# Altium PCB Copy of PCI Express_16765X6890_164PIN_Low profile.PCBDOC
Units mm, origin at the board's own origin, x right, y up, seen from the top; angles counter-clockwise.
Board outline 167.75 x 69 mm, 4 copper layers (TopLayer, InternalPlane1, InternalPlane2, BottomLayer); 1 components, 81 nets, 166 pads, 0 vias.
Unrouted connection lines stored in the file: 76.
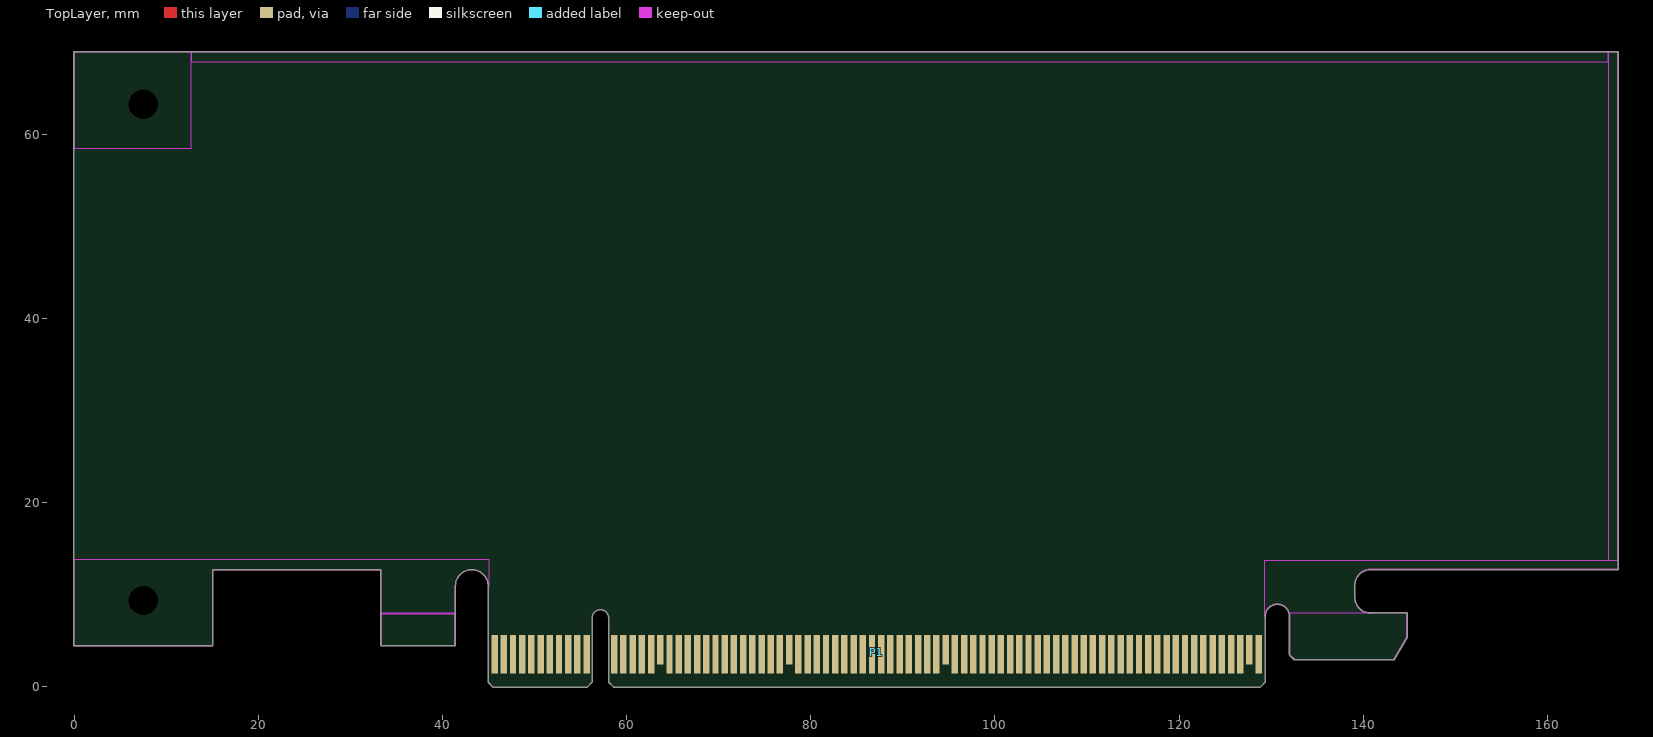
[diagram p0: TopLayer view]
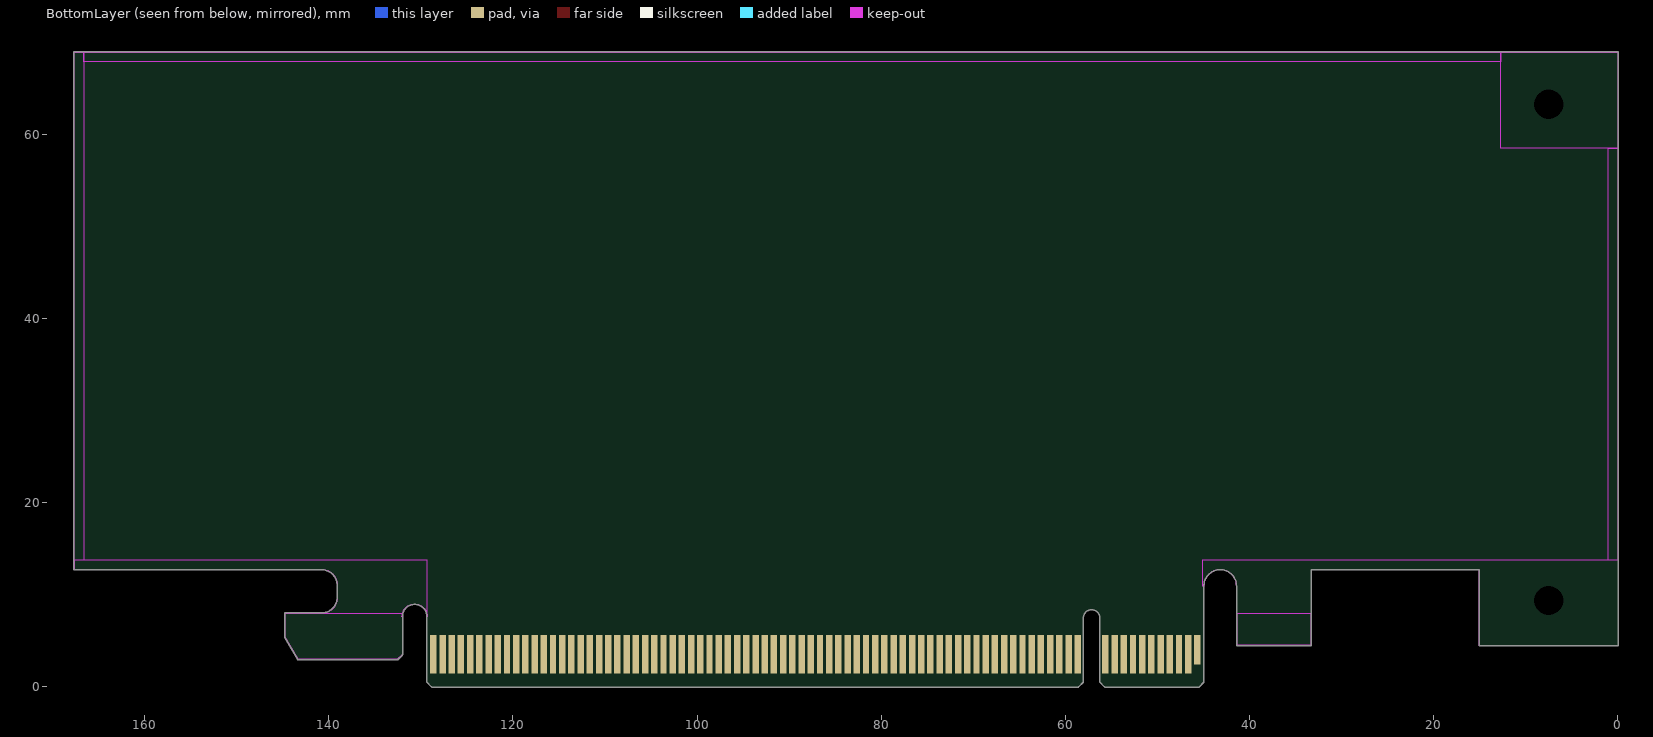
[diagram p1: BottomLayer view, seen from below]
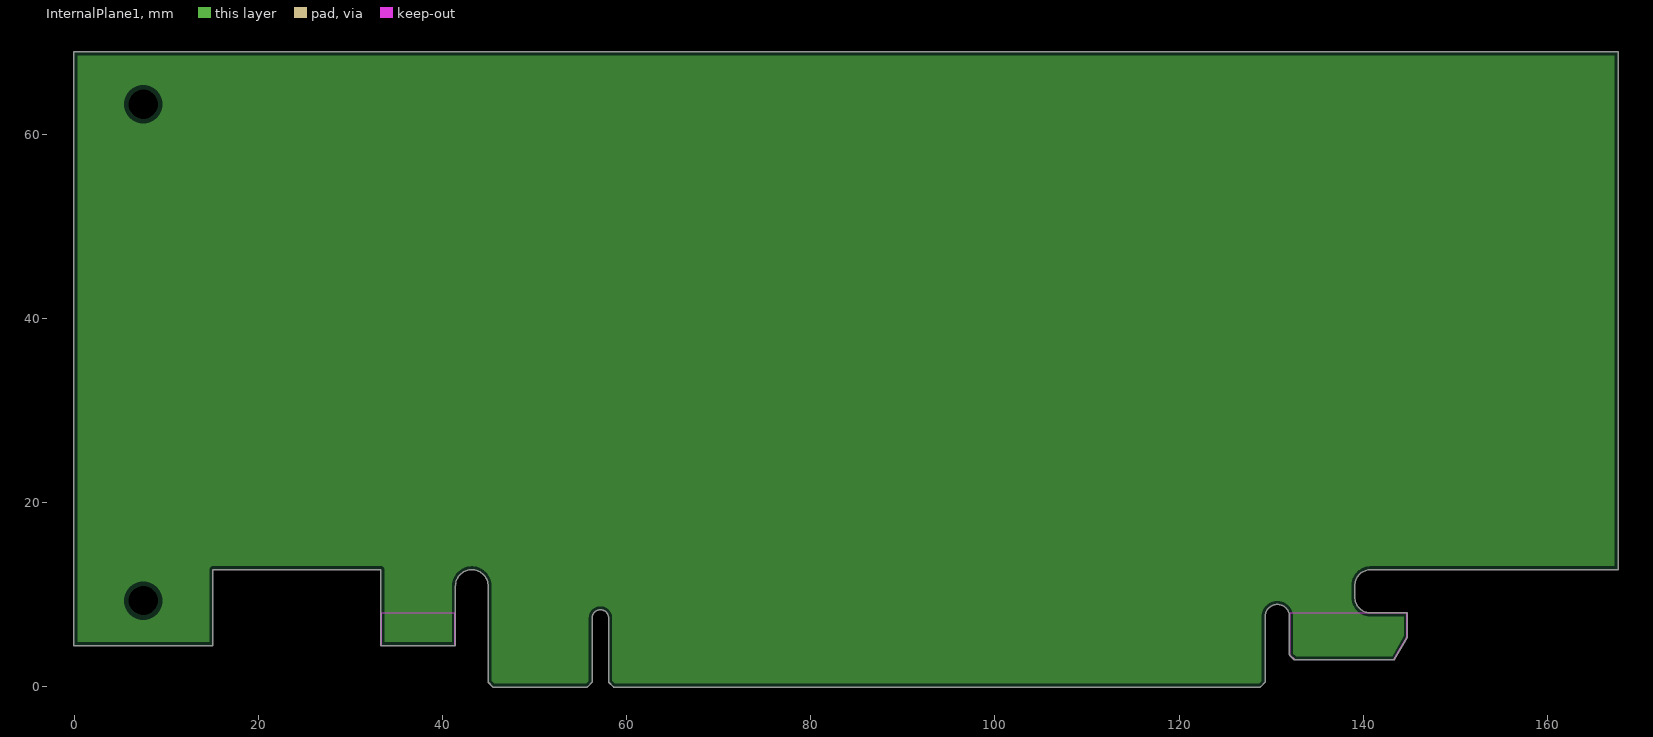
[diagram p2: InternalPlane1, clearances drawn from the general rule]
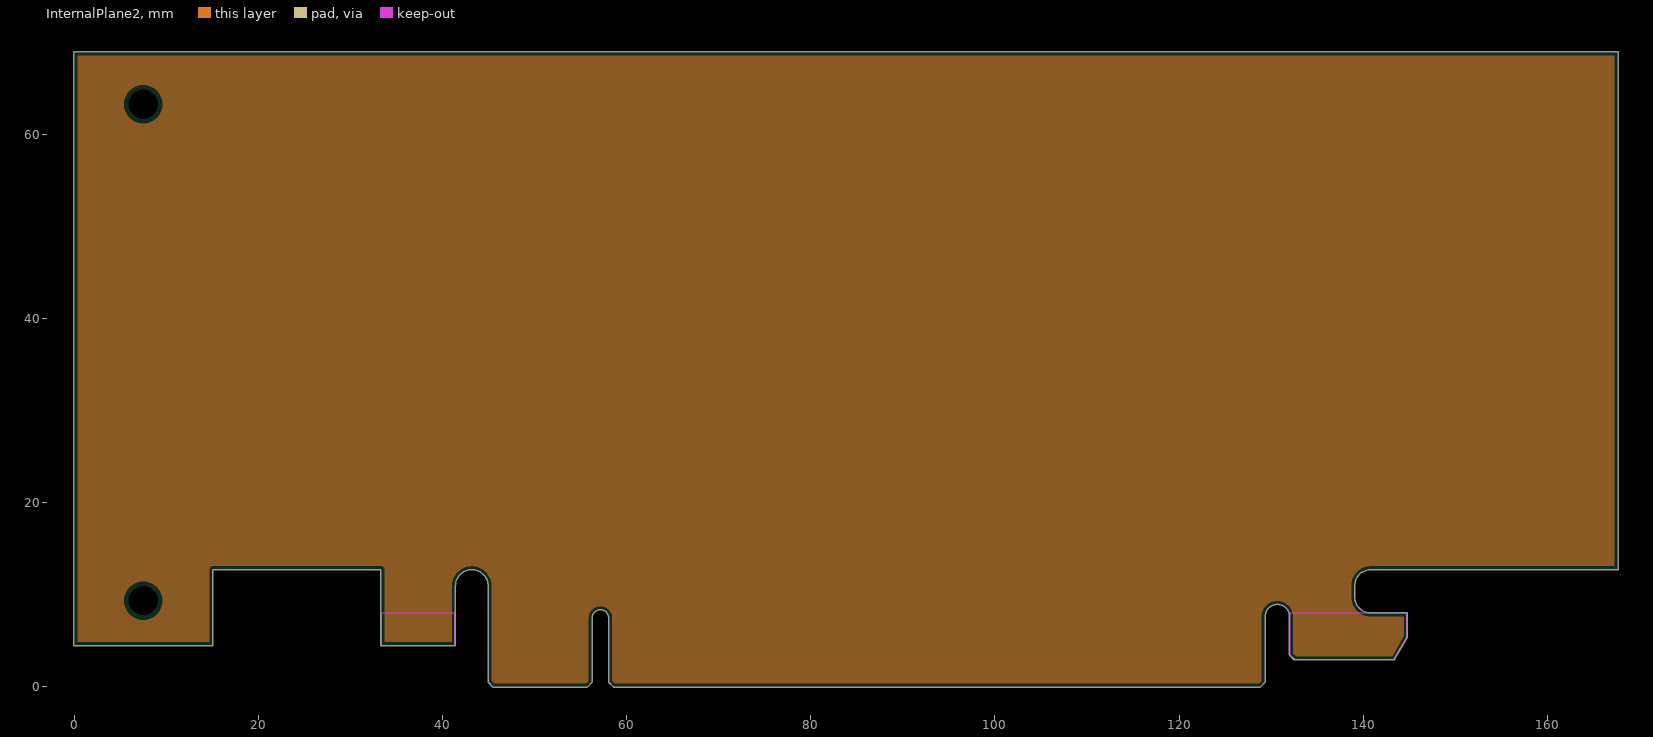
[diagram p3: InternalPlane2, clearances drawn from the general rule]

## Layer stack, top to bottom
TopSolder: solder mask 0.0102, Solder Resist, Dk 3.5
TopLayer: signal copper 0.0178
Dielectric1: core 0.32, FR-4, Dk 4.8
InternalPlane1: plane copper 0.0356
Dielectric2: prepreg 0.32, FR-4, Dk 4.8
InternalPlane2: plane copper 0.0356
Dielectric3: core 0.32, FR-4, Dk 4.8
BottomLayer: signal copper 0.0178
BottomSolder: solder mask 0.0102, Solder Resist, Dk 3.5

## Board outline
44.965,0.464 cw(c45,0.5) 44.95,0.5 44.95,10.925 ccw(c43.175,10.925) 41.4,10.925 ccw(c43.175,10.925) 41.4,10.925 ccw(c41.35,10.925) 41.4,10.925 41.4,4.5 cw(c41.35,4.5) 41.35,4.45 33.35,4.45 cw(c33.35,4.5) 33.3,4.5 33.3,12.7 15.05,12.7 15.05,4.5 cw(c15,4.5) 15,4.45 0,4.45 cw(c0,4.5) -0.05,4.5 -0.05,68.9 cw(c0,68.9) 0,68.95 167.65,68.95 cw(c167.65,68.9) 167.7,68.9 167.7,12.75 cw(c167.65,12.75) 167.65,12.7 140.8,12.7 ccw(c140.8,11) 139.1,11 139.1,9.7 ccw(c140.8,9.7) 140.8,8 144.75,8 cw(c144.75,7.95) 144.8,7.95 144.8,5.375 cw(c144.75,5.375) 144.794,5.35 143.394,2.925 cw(c143.35,2.95) 143.35,2.9 132.55,2.9 cw(c132.55,2.95) 132.514,2.915 132.514,2.914 132.014,3.414 132.015,3.414 cw(c132.05,3.45) 132,3.45 132,7.605 ccw(c130.675,7.605) 130.675,8.93 ccw(c130.675,7.605) 129.35,7.605 ccw(c129.3,7.605) 129.35,7.605 129.35,0.5 cw(c129.3,0.5) 129.335,0.464 129.336,0.464 128.836,-0.036 cw(c128.8,0) 128.8,-0.05 58.6,-0.05 cw(c58.6,0) 58.564,-0.035 58.564,-0.036 58.064,0.464 58.065,0.464 cw(c58.1,0.5) 58.05,0.5 58.05,7.45 ccw(c57.15,7.45) 56.25,7.45 56.25,0.5 cw(c56.2,0.5) 56.235,0.464 56.236,0.464 55.736,-0.036 55.736,-0.035 cw(c55.7,0) 55.7,-0.05 45.5,-0.05 cw(c45.5,0) 45.464,-0.035 45.464,-0.036

## Design rules (kind name [scope] priority, off if disabled: settings)
Clearance [All] p1: gap=0.254 ignorepadtopadclearanceinfootprint=FALSE except(0: Arc-Hole Track-Hole SMDPad-Hole THPad-Hole Via-Hole Fill-Hole Poly-Hole Region-Hole Text-Hole)
DiffPairsRouting [All] p1: maxlimit=0.254 minlimit=0.254 mostfreqgap=0.254 toplayer_minwidth=0.381 toplayer_maxwidth=0.381 toplayer_prefwidth=0.381 bottomlayer_minwidth=0.381 bottomlayer_maxwidth=0.381 bottomlayer_prefwidth=0.381 maxuncoupledlength=12.7
FabricationTestPointUsage TestPointUsage [All] p1: valid=0 allowmultiple=FALSE
FabricationTestpoint Testpoint [All] p1: side=3 testpointundercomponent=TRUE minsize=1.016 maxsize=2.54 preferedsize=1.524 minholesize=0.508 maxholesize=1.016 preferedholesize=0.813 testpointgrid=0.025 allowsidetop=TRUE allowsidebottom=TRUE usegrid=TRUE gridtolerance=0
Height "PCI Express, Page 84, \"Component Height Constraints\" for solder side" [OnBottomLayer] p1: minheight=0 maxheight=2.67 prefheight=2.67
Height "PCI Express, Page 84, \"Component Height Constraints\" for component side" [OnTopLayer] p2: minheight=0 maxheight=14.47 prefheight=14.47
PlaneClearance [All] p1: clearance=0.5
PlaneConnect [All] p1: planeconnectstyle=Relief reliefexpansion=0.508 reliefentries=4 reliefconductorwidth=0.254 reliefairgap=0.254
PolygonConnect [All] p1: connectstyle=Relief reliefconductorwidth=0.254 reliefentries=4 polygonreliefangle="90 Angle" airgapwidth=0.254
RoomDefinition "Component Free Area" [InAnyComponent] p1: confinementstyle=ConfineOut formatcopy=TRUE lockcomponents=FALSE outline 142.05,13.75 142.05,14.1 150.2,14.1 150.2,16.1 155.45,16.1 155.45,13.75
RoutingVias [All] p1: holewidth=0.711 width=1.27 viastyle="Through Hole" minholewidth=0.711 minwidth=1.27 maxholewidth=0.711 maxwidth=1.27
SilkToSolderMaskClearance SilkscreenOverComponentPads [IsPad] p1: minsilkscreentomaskgap=0.254 clearancetoexposedcopper=TRUE
SolderMaskExpansion [All] p1: expansion=0
Width [All] p1: maxlimit=0.254 minlimit=0.254 preferedwidth=0.254
23 further rules are at their usual default settings.

## Classes and differential pairs
net class JTAG[1..5]: JTAG1 JTAG2 JTAG3 JTAG4 JTAG5
differential pair PET15: +PET15_P -PET15_N
differential pair PET14: +PET14_P -PET14_N
differential pair PET13: +PET13_P -PET13_N
differential pair PET12: +PET12_P -PET12_N
differential pair PET11: +PET11_P -PET11_N
differential pair PET10: +PET10_P -PET10_N
differential pair PET9: +PET9_P -PET9_N
differential pair PET8: +PET8_P -PET8_N
differential pair PET7: +PET7_P -PET7_N
differential pair PET6: +PET6_P -PET6_N
differential pair PET5: +PET5_P -PET5_N
differential pair PET4: +PET4_P -PET4_N
differential pair PET3: +PET3_P -PET3_N
differential pair PET2: +PET2_P -PET2_N
differential pair PET1: +PET1_P -PET1_N
differential pair PET0: +PET0_P -PET0_N
differential pair PER15: +PER15_P -PER15_N
differential pair PER14: +PER14_P -PER14_N
differential pair PER13: +PER13_P -PER13_N
differential pair PER12: +PER12_P -PER12_N
differential pair PER11: +PER11_P -PER11_N
differential pair PER10: +PER10_P -PER10_N
differential pair PER9: +PER9_P -PER9_N
differential pair PER8: +PER8_P -PER8_N
differential pair PER7: +PER7_P -PER7_N
differential pair PER6: +PER6_P -PER6_N
differential pair PER5: +PER5_P -PER5_N
differential pair PER4: +PER4_P -PER4_N
differential pair PER3: +PER3_P -PER3_N
differential pair PER2: +PER2_P -PER2_N
differential pair PER1: +PER1_P -PER1_N
differential pair PER0: +PER0_P -PER0_N

## Components (designator, comment, footprint, x,y, rotation, side; value= is the part's Value field where it differs from the comment)
P1 "PCIeX16-GF-2D-1000-1K-O164" PCIeX16-GF-2D-1000-1K-O164 55.15,3.5 r0 top locked

## Footprints (in the part's own frame and the unit in brackets; to place one, negate y for a bottom-side part, rotate by r counter-clockwise, add the part's x,y. Pads: shape width x height; smd on the part's side, far side on the other; paste and mask are expansions set on the pad)
PCIeX16-GF-2D-1000-1K-O164 [mm] "Golden finger, PCIeX16, Dual, Opposite, Pitch 1mm, 164-Position"
  rect 0.7x3.2 smd far side paste-1: A1(-9.5,0.5)
  rect 0.7x4.2 smd far side paste-1: A2(-8.5,0) A3(-7.5,0) A4(-6.5,0) A5(-5.5,0) A6(-4.5,0) A7(-3.5,0) A8(-2.5,0) A9(-1.5,0) A10(-0.5,0) A11(0.5,0) A12(3.5,0) A13(4.5,0) A14(5.5,0) A15(6.5,0) A16(7.5,0) A17(8.5,0) A18(9.5,0) A19(10.5,0) A20(11.5,0) A21(12.5,0) A22(13.5,0) A23(14.5,0) A24(15.5,0) A25(16.5,0) A26(17.5,0) A27(18.5,0) A28(19.5,0) A29(20.5,0) A30(21.5,0) A31(22.5,0) A32(23.5,0) A33(24.5,0) A34(25.5,0) A35(26.5,0) A36(27.5,0) A37(28.5,0) A38(29.5,0) A39(30.5,0) A40(31.5,0) A41(32.5,0) A42(33.5,0) A43(34.5,0) A44(35.5,0) A45(36.5,0) A46(37.5,0) A47(38.5,0) A48(39.5,0) A49(40.5,0) A50(41.5,0) A51(42.5,0) A52(43.5,0) A53(44.5,0) A54(45.5,0) A55(46.5,0) A56(47.5,0) A57(48.5,0) A58(49.5,0) A59(50.5,0) A60(51.5,0) A61(52.5,0) A62(53.5,0) A63(54.5,0) A64(55.5,0) A65(56.5,0) A66(57.5,0) A67(58.5,0) A68(59.5,0) A69(60.5,0) A70(61.5,0) A71(62.5,0) A72(63.5,0) A73(64.5,0) A74(65.5,0) A75(66.5,0) A76(67.5,0) A77(68.5,0) A78(69.5,0) A79(70.5,0) A80(71.5,0) A81(72.5,0) A82(73.5,0)
  rect 0.7x4.2 smd paste-1: B1(-9.5,0) B2(-8.5,0) B3(-7.5,0) B4(-6.5,0) B5(-5.5,0) B6(-4.5,0) B7(-3.5,0) B8(-2.5,0) B9(-1.5,0) B10(-0.5,0) B11(0.5,0) B12(3.5,0) B13(4.5,0) B14(5.5,0) B15(6.5,0) B16(7.5,0) B18(9.5,0) B19(10.5,0) B20(11.5,0) B21(12.5,0) B22(13.5,0) B23(14.5,0) B24(15.5,0) B25(16.5,0) B26(17.5,0) B27(18.5,0) B28(19.5,0) B29(20.5,0) B30(21.5,0) B32(23.5,0) B33(24.5,0) B34(25.5,0) B35(26.5,0) B36(27.5,0) B37(28.5,0) B38(29.5,0) B39(30.5,0) B40(31.5,0) B41(32.5,0) B42(33.5,0) B43(34.5,0) B44(35.5,0) B45(36.5,0) B46(37.5,0) B47(38.5,0) B49(40.5,0) B50(41.5,0) B51(42.5,0) B52(43.5,0) B53(44.5,0) B54(45.5,0) B55(46.5,0) B56(47.5,0) B57(48.5,0) B58(49.5,0) B59(50.5,0) B60(51.5,0) B61(52.5,0) B62(53.5,0) B63(54.5,0) B64(55.5,0) B65(56.5,0) B66(57.5,0) B67(58.5,0) B68(59.5,0) B69(60.5,0) B70(61.5,0) B71(62.5,0) B72(63.5,0) B73(64.5,0) B74(65.5,0) B75(66.5,0) B76(67.5,0) B77(68.5,0) B78(69.5,0) B79(70.5,0) B80(71.5,0) B82(73.5,0)
  rect 0.7x3.2 smd paste-1: B17(8.5,0.5) B31(22.5,0.5) B48(39.5,0.5) B81(72.5,0.5)

## Part data
P1: library part CMP-0001-00033-2, "Golden finger, PCIeX16, Dual, Opposite, Pitch 1mm, 164-Position"

## Free pads (board coordinates)
  round 2.88 hole 3.18 unplated: MH1(7.5,9.35) MH2(7.5,63.25)

## Nets (pads, with @x,y where several pads share a name; then routed paths per layer and width w, separated by ;. In a path a pad name is that pad's centre, name@x,y a point inside that pad or via, vN(x,y) a via of type N, cw(c..) or ccw(c..) an arc to the next point about the centre after c; other vN are vias at no path point)
3.3VAUX: P1.B10
+3.3V: P1.A9 P1.A10 P1.B8
+12V: P1.A2 P1.A3 P1.B1 P1.B2 P1.B3
GND: P1.A4 P1.A12 P1.A15 P1.A18 P1.A20 P1.A23 P1.A24 P1.A27 P1.A28 P1.A31 P1.A34 P1.A37 P1.A38 P1.A41 P1.A42 P1.A45 P1.A46 P1.A49 P1.A51 P1.A54 P1.A55 P1.A58 P1.A59 P1.A62 P1.A63 P1.A66 P1.A67 P1.A70 P1.A71 P1.A74 P1.A75 P1.A78 P1.A79 P1.A82 P1.B4 P1.B7 P1.B13 P1.B16 P1.B18 P1.B21 P1.B22 P1.B25 P1.B26 P1.B29 P1.B32 P1.B35 P1.B36 P1.B39 P1.B40 P1.B43 P1.B44 P1.B47 P1.B49 P1.B52 P1.B53 P1.B56 P1.B57 P1.B60 P1.B61 P1.B64 P1.B65 P1.B68 P1.B69 P1.B72 P1.B73 P1.B76 P1.B77 P1.B80
JTAG1: P1.B9
JTAG2: P1.A5
JTAG3: P1.A6
JTAG4: P1.A7
JTAG5: P1.A8
PER0_N: P1.A17
PER0_P: P1.A16
PER1_N: P1.A22
PER1_P: P1.A21
PER2_N: P1.A26
PER2_P: P1.A25
PER3_N: P1.A30
PER3_P: P1.A29
PER4_N: P1.A36
PER4_P: P1.A35
PER5_N: P1.A40
PER5_P: P1.A39
PER6_N: P1.A44
PER6_P: P1.A43
PER7_N: P1.A48
PER7_P: P1.A47
PER8_N: P1.A53
PER8_P: P1.A52
PER9_N: P1.A57
PER9_P: P1.A56
PER10_N: P1.A61
PER10_P: P1.A60
PER11_N: P1.A65
PER11_P: P1.A64
PER12_N: P1.A69
PER12_P: P1.A68
PER13_N: P1.A73
PER13_P: P1.A72
PER14_N: P1.A77
PER14_P: P1.A76
PER15_N: P1.A81
PER15_P: P1.A80
PERST#: P1.A11
PET0_N: P1.B15
PET0_P: P1.B14
PET1_N: P1.B20
PET1_P: P1.B19
PET2_N: P1.B24
PET2_P: P1.B23
PET3_N: P1.B28
PET3_P: P1.B27
PET4_N: P1.B34
PET4_P: P1.B33
PET5_N: P1.B38
PET5_P: P1.B37
PET6_N: P1.B42
PET6_P: P1.B41
PET7_N: P1.B46
PET7_P: P1.B45
PET8_N: P1.B51
PET8_P: P1.B50
PET9_N: P1.B55
PET9_P: P1.B54
PET10_N: P1.B59
PET10_P: P1.B58
PET11_N: P1.B63
PET11_P: P1.B62
PET12_N: P1.B67
PET12_P: P1.B66
PET13_N: P1.B71
PET13_P: P1.B70
PET14_N: P1.B75
PET14_P: P1.B74
PET15_N: P1.B79
PET15_P: P1.B78
PRSNT1#: P1.A1
PRSNT2#: P1.B17 P1.B31 P1.B48 P1.B81
REFCLK+: P1.A13
REFCLK-: P1.A14
SMCLK: P1.B5
SMDAT: P1.B6
WAKE#: P1.B11
pads on no net: P1.A19 P1.A32 P1.A33 P1.A50 P1.B12 P1.B30 P1.B82

## Polygon pours and split planes (outlines as drawn)
no net on InternalPlane1 (split plane): 188 vertices, not listed, extent 0.332,0.332 167.318,68.568
no net on InternalPlane2 (split plane): 188 vertices, not listed, extent 0.332,0.332 167.318,68.568

## Keep-outs
TopLayer:
  rectangle: 166.65,13.75 167.65,68.9
  rectangle: 12.7,67.9 166.65,68.9
  rectangle: 0,58.5 12.7,68.9
  region: 0,4.45 15,4.45 ccw(c15,4.5) 15.05,4.5 15.05,12.7 33.3,12.7 33.3,7.95 ccw(c33.35,7.95) 33.35,7.9 41.35,7.9 ccw(c41.35,7.95) 41.4,7.95 ccw(c41.35,7.95) 41.4,7.951 41.4,10.925 cw(c43.175,10.925) 44.95,10.925 ccw(c45,10.925) 45.05,10.925 45.05,13.75 ccw(c45,13.75) 45,13.8 0,13.8 ccw(c0,13.75) -0.05,13.75 -0.05,4.5 ccw(c0,4.5)
  region: 129.3,7.605 129.3,13.75 167.65,13.75 167.65,12.75 140.8,12.75 ccw(c140.8,11) 139.05,11 139.05,9.7 ccw(c140.8,9.7) 140.8,7.95 132.05,7.95 132.05,7.605 ccw(c130.675,7.605)
BottomLayer:
  rectangle: 0,13.75 1,58.5
  rectangle: 0,58.5 12.7,68.9
  rectangle: 12.7,67.9 166.65,68.9
  rectangle: 166.65,13.75 167.65,68.9
  region: 0,4.45 15,4.45 ccw(c15,4.5) 15.05,4.5 15.05,12.7 33.3,12.7 33.3,7.95 ccw(c33.35,7.95) 33.35,7.9 41.35,7.9 ccw(c41.35,7.95) 41.4,7.95 ccw(c41.35,7.95) 41.4,7.951 41.4,10.925 cw(c43.175,10.925) 44.95,10.925 ccw(c45,10.925) 45.05,10.925 45.05,13.75 ccw(c45,13.75) 45,13.8 0,13.8 ccw(c0,13.75) -0.05,13.75 -0.05,4.5 ccw(c0,4.5)
  region: 129.312,7.605 129.312,13.75 167.662,13.75 167.662,12.75 140.812,12.75 ccw(c140.812,11) 139.062,11 139.062,9.7 ccw(c140.812,9.7) 140.812,7.95 132.062,7.95 132.062,7.605 ccw(c130.687,7.605)
TopSolder:
  rectangle: 33.35,4.5 41.35,7.95
  region: 132.05,3.45 132.55,2.95 143.35,2.95 144.75,5.375 144.75,7.95 132.05,7.95
BottomSolder:
  rectangle: 33.35,4.5 41.35,7.95
  region: 132.05,3.45 132.55,2.95 143.35,2.95 144.75,5.375 144.75,7.95 132.05,7.95
KeepOutLayer:
  rectangle: 33.35,4.5 41.35,7.95
  region: 132.05,3.45 132.55,2.95 143.35,2.95 144.75,5.375 144.75,7.95 132.05,7.95

## Silkscreen, mask and mechanical layers (free items; w line width, h text height)
PCI-SIG Outline:
  lines w0.1: 129.3,7.605 cw(c130.675,7.605) 132.05,7.605 ; 129.3,7.605 cw(c130.675,7.605) 132.05,7.605 ; 129.3,7.605 129.3,0.5 128.8,0 58.6,0 58.1,0.5 58.1,7.45 ccw(c57.15,7.45) 56.2,7.45 56.2,0.5 55.7,0 45.5,0 45,0.5 45,10.925 ccw(c43.175,10.925) 41.35,10.925 41.35,4.5 33.35,4.5 33.35,12.75 15,12.75 15,4.5 0,4.5 0,68.9 167.65,68.9 167.65,12.75 140.8,12.75 ccw(c140.8,11) 139.05,11 139.05,9.7 ccw(c140.8,9.7) 140.8,7.95 144.75,7.95 144.75,5.375 143.35,2.95 132.55,2.95 132.05,3.45 132.05,7.605
PCI-SIG Notes:
  text "- Nominal values used, dimensions in mm" at 170,17.75 h1.52
  text "- The mounting holes and keep-out areas around them are only required when the I/O bracket is mounted on the card directly" at 170,16.5 h1.52
  text "- Component height rule and clearance rule derived from PCI_Express_CEM_r2.0.pdf, Page 84." at 170,15.25 h1.52
  text "- Stackup is not specified in PCI_Express_CEM_r2.0.pdf, nor implemented in this template." at 170,14 h1.52
Mechanical7:
  lines w0.1: 41.35,7.95 33.35,7.95 33.35,12.75 15,12.75 15,4.5 0,4.5 0,13.75 45,13.75 45,10.925 ccw(c43.175,10.925) 41.35,10.925 41.35,7.95 ; 41.35,7.95 41.35,7.95 ; 132.05,7.95 132.05,7.605 ccw(c130.675,7.605) 129.3,7.605 129.3,13.75 167.65,13.75 167.65,12.75 140.8,12.75 ccw(c140.8,11) 139.05,11 139.05,9.7 ccw(c140.8,9.7) 140.8,7.95 132.05,7.95 ; 132.05,7.95 132.05,3.45 132.55,2.95 143.35,2.95 144.75,5.375 144.75,7.95 132.05,7.95

## Dimensions
0,68.9 to 167.65,68.9 on PCI-SIG Dimensions
0,4.5 to 0,68.9 on PCI-SIG Dimensions
0,0 to 0,68.9 on PCI-SIG Dimensions